# Altium PCB NAW_CW330_PANELIZED.PcbDoc
Units mm, origin at the board's own origin, x right, y up, seen from the top; angles counter-clockwise.
Board outline 200 x 165 mm, 8 copper layers (Top Layer, Int1 (GND), Int 2 (SIG), Int 3 (SIG), Int 4 (PWR), Int 5 (SIG), Int 6 (PWR), Bottom Layer), stack 1.527 mm thick; 8 components, 0 nets, 12 pads, 0 vias.
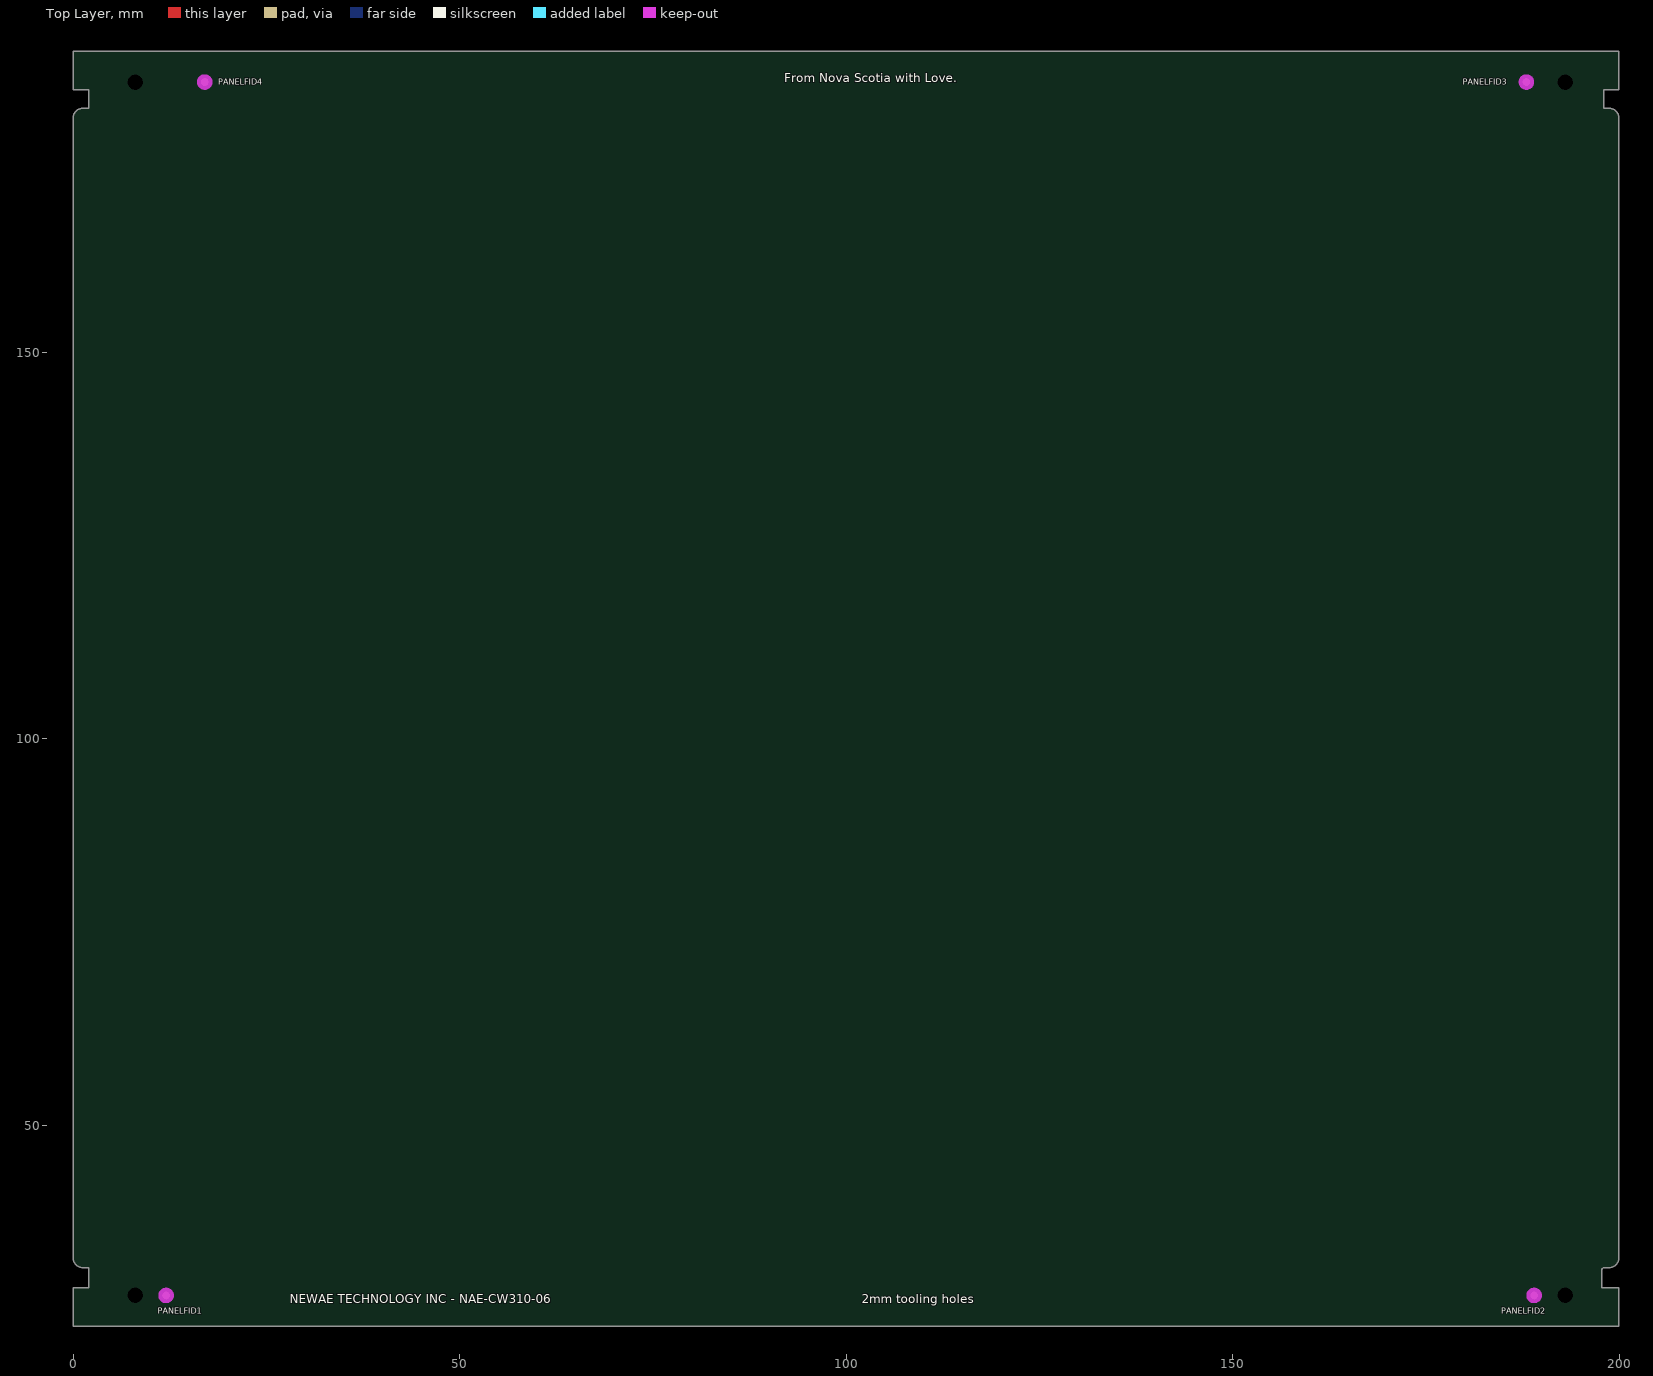
[diagram p0: Top Layer view]
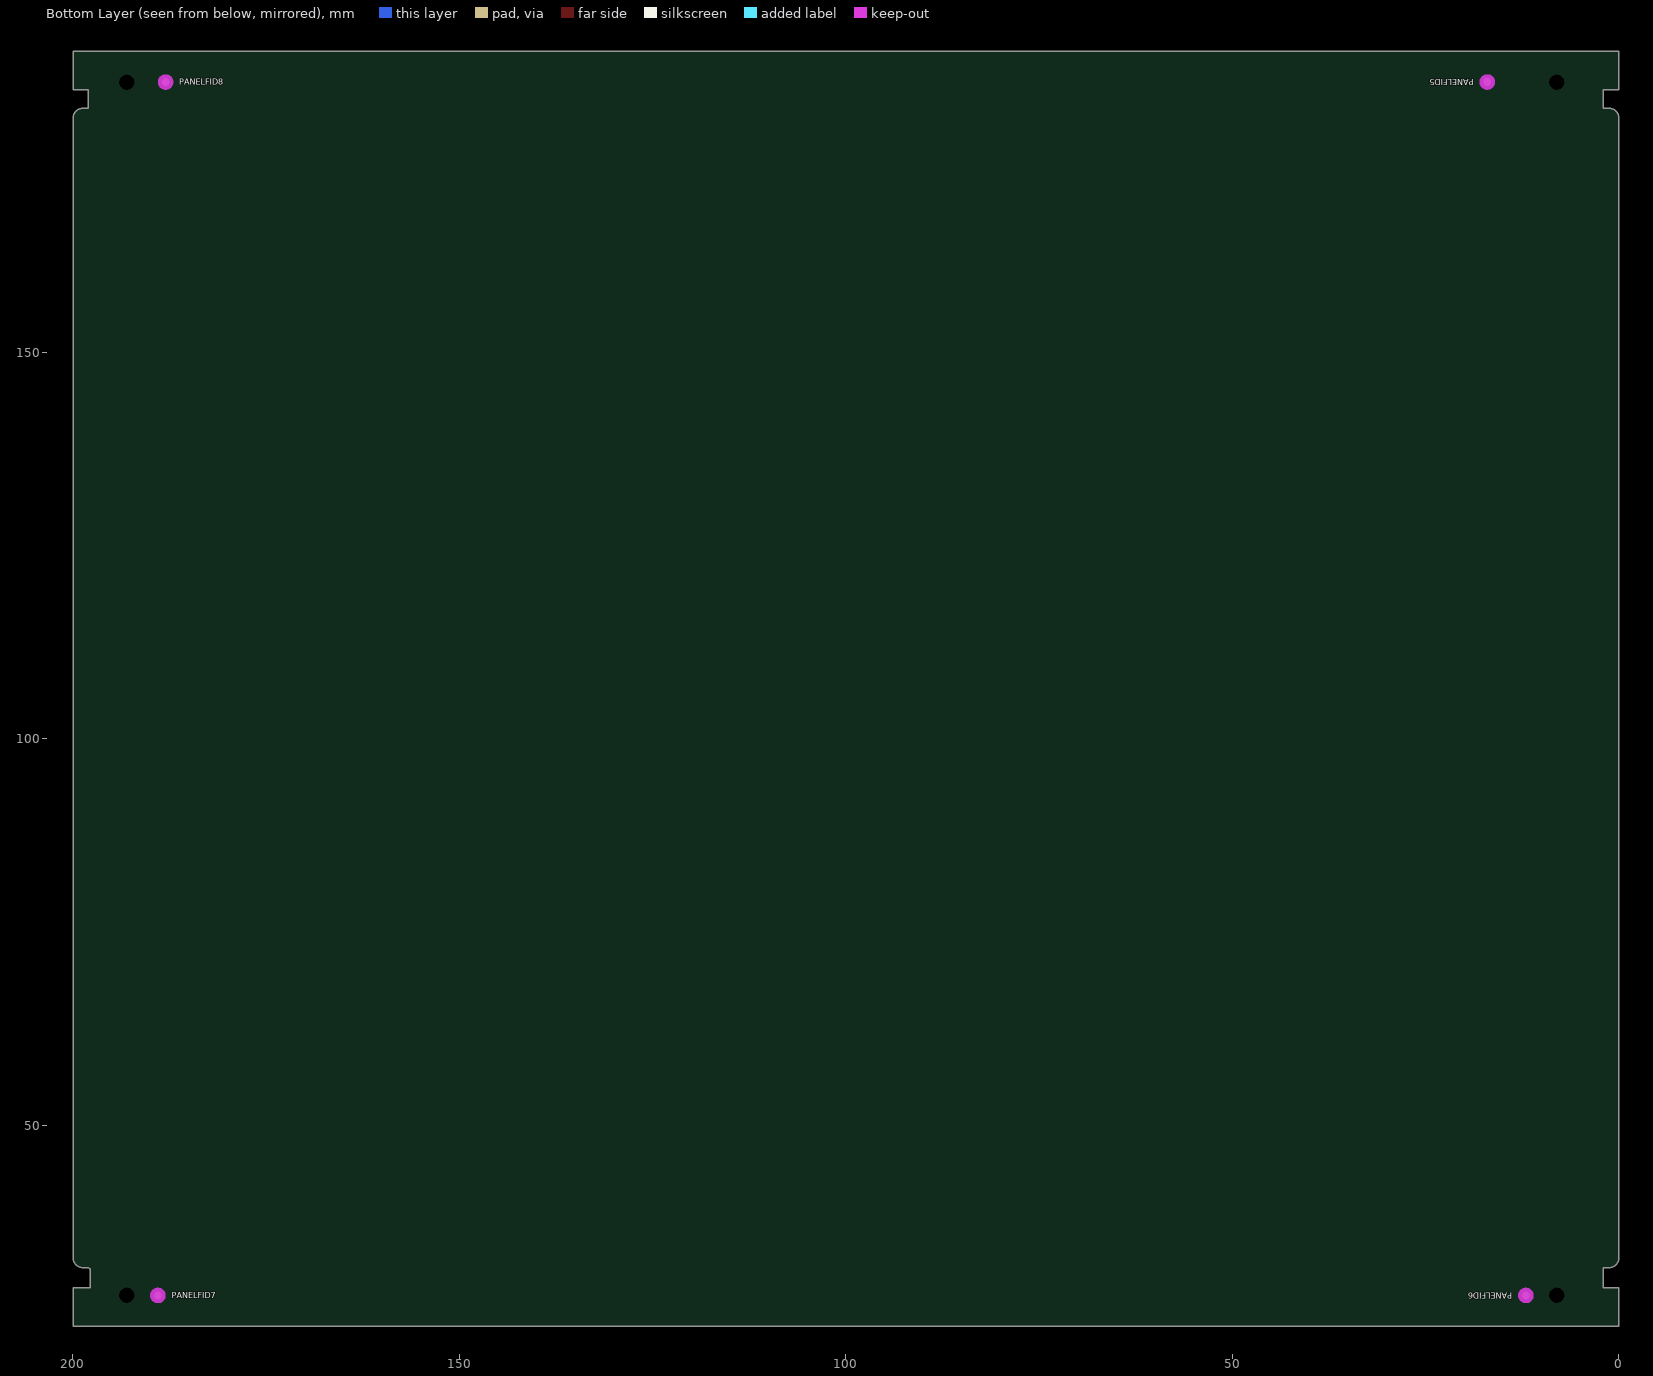
[diagram p1: Bottom Layer view, seen from below]
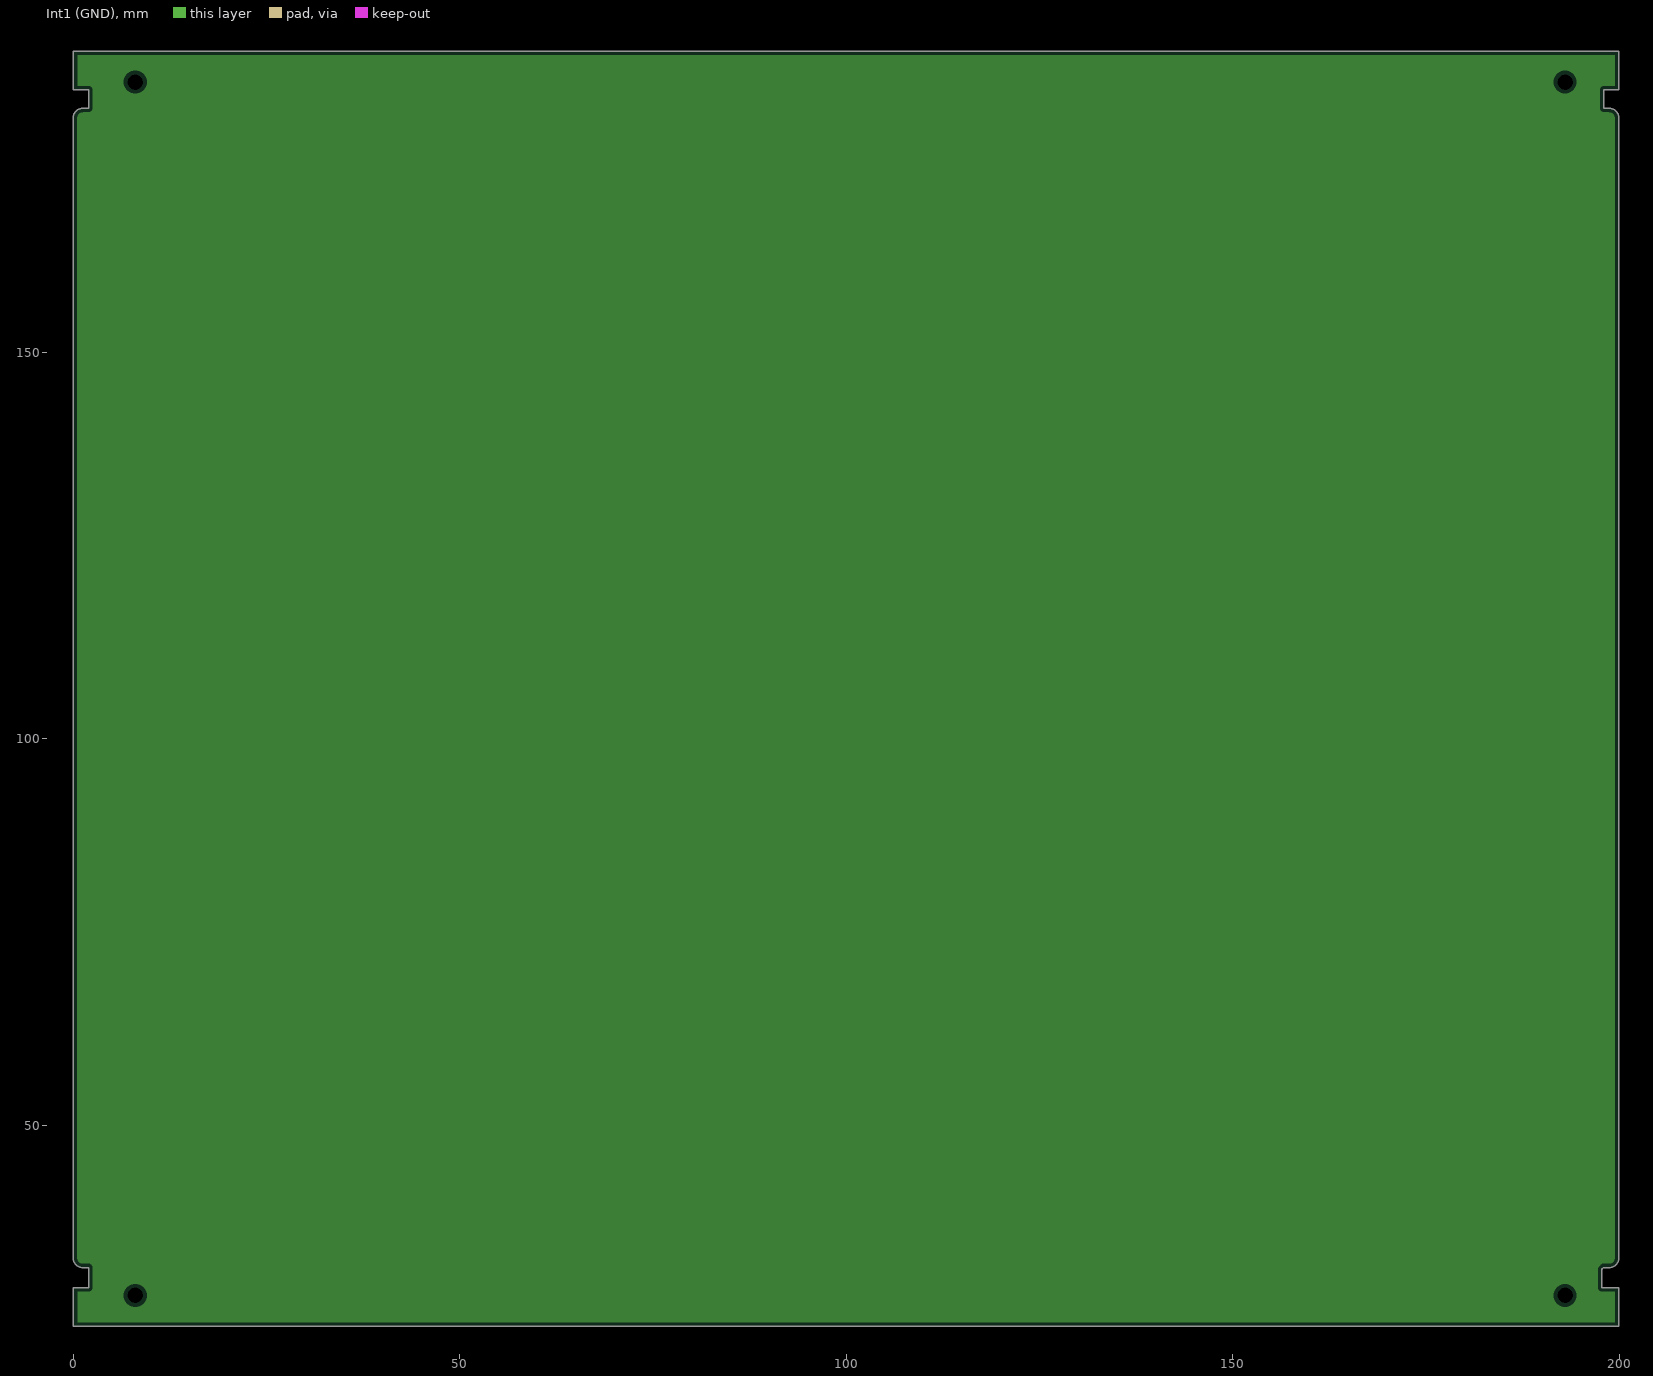
[diagram p2: Int1 (GND), clearances drawn from the general rule]
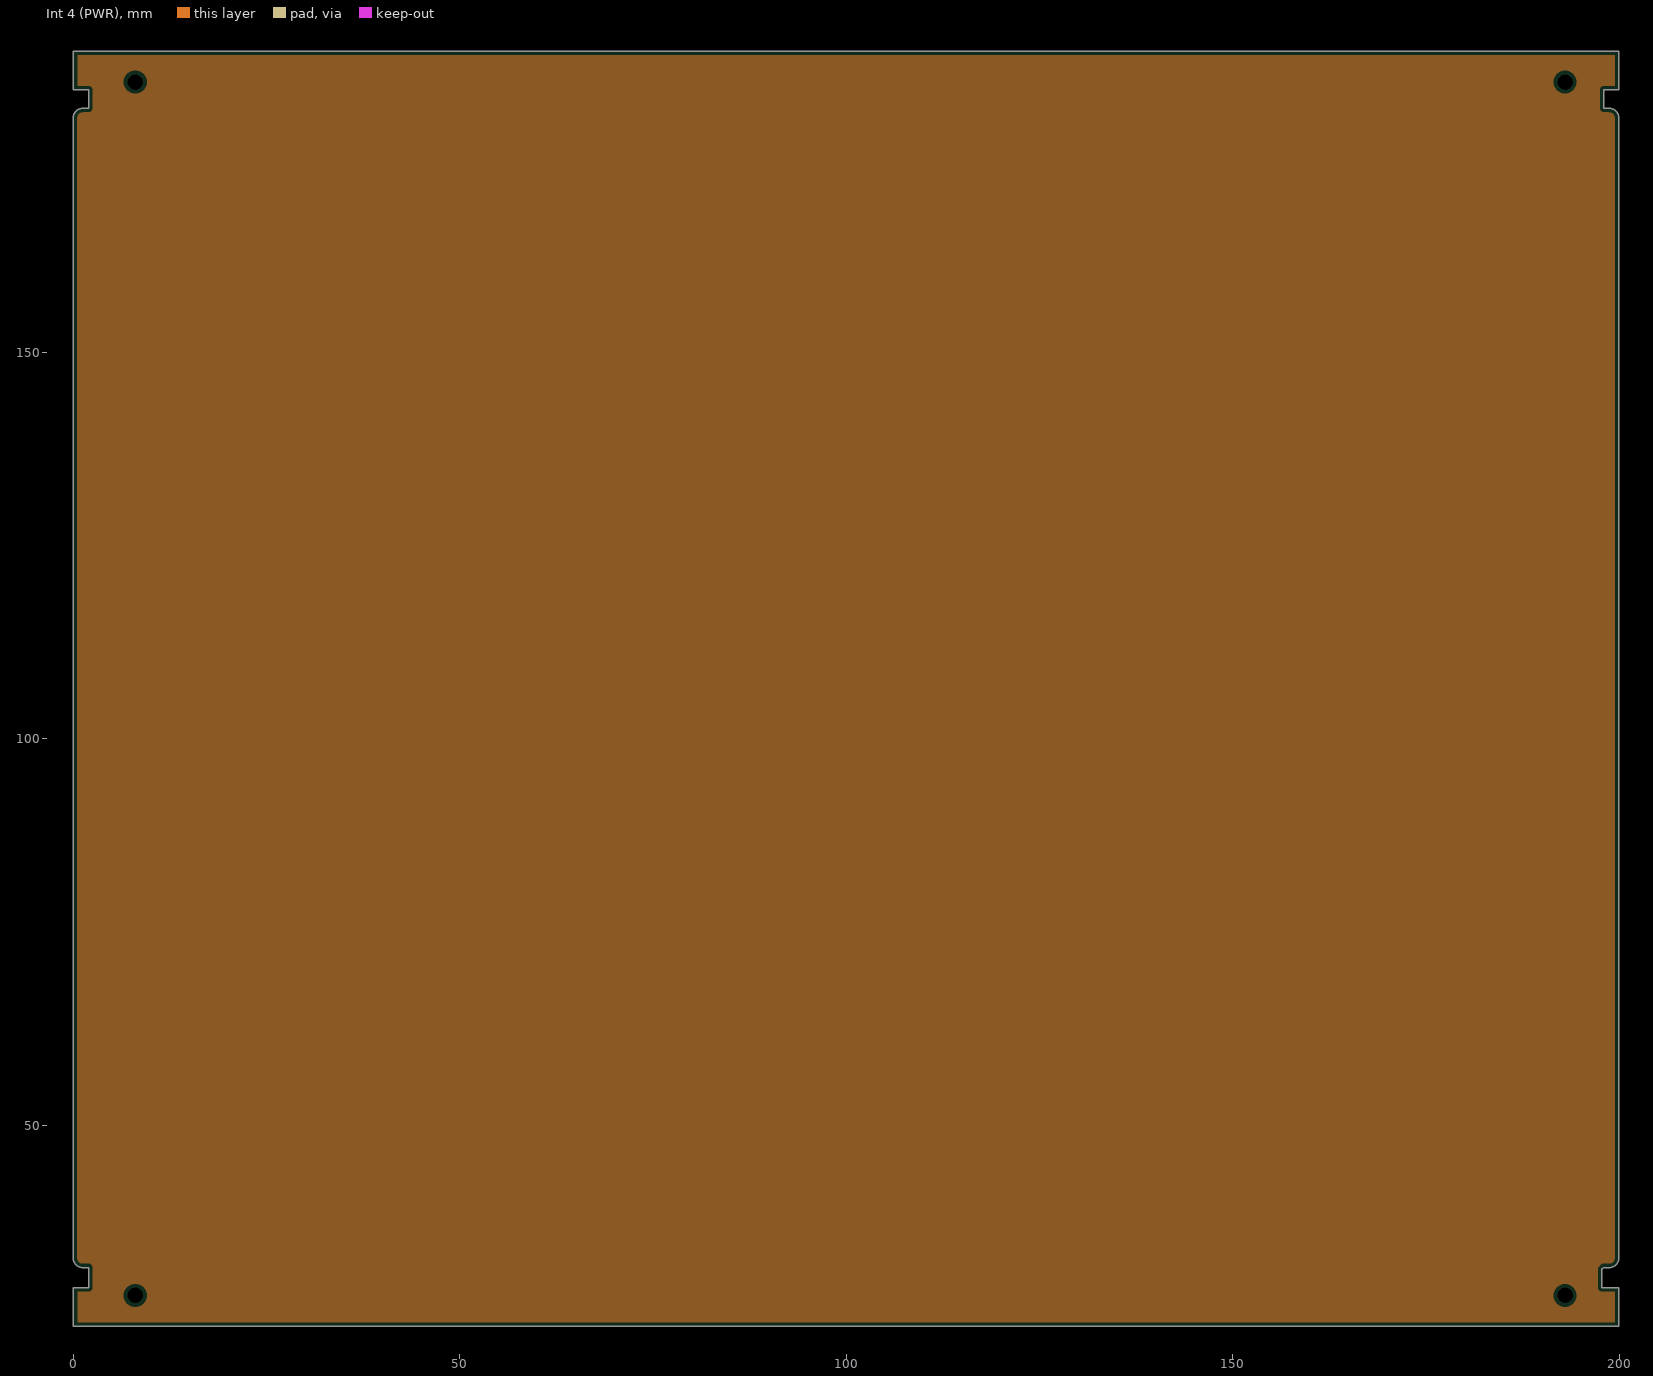
[diagram p3: Int 4 (PWR), clearances drawn from the general rule]
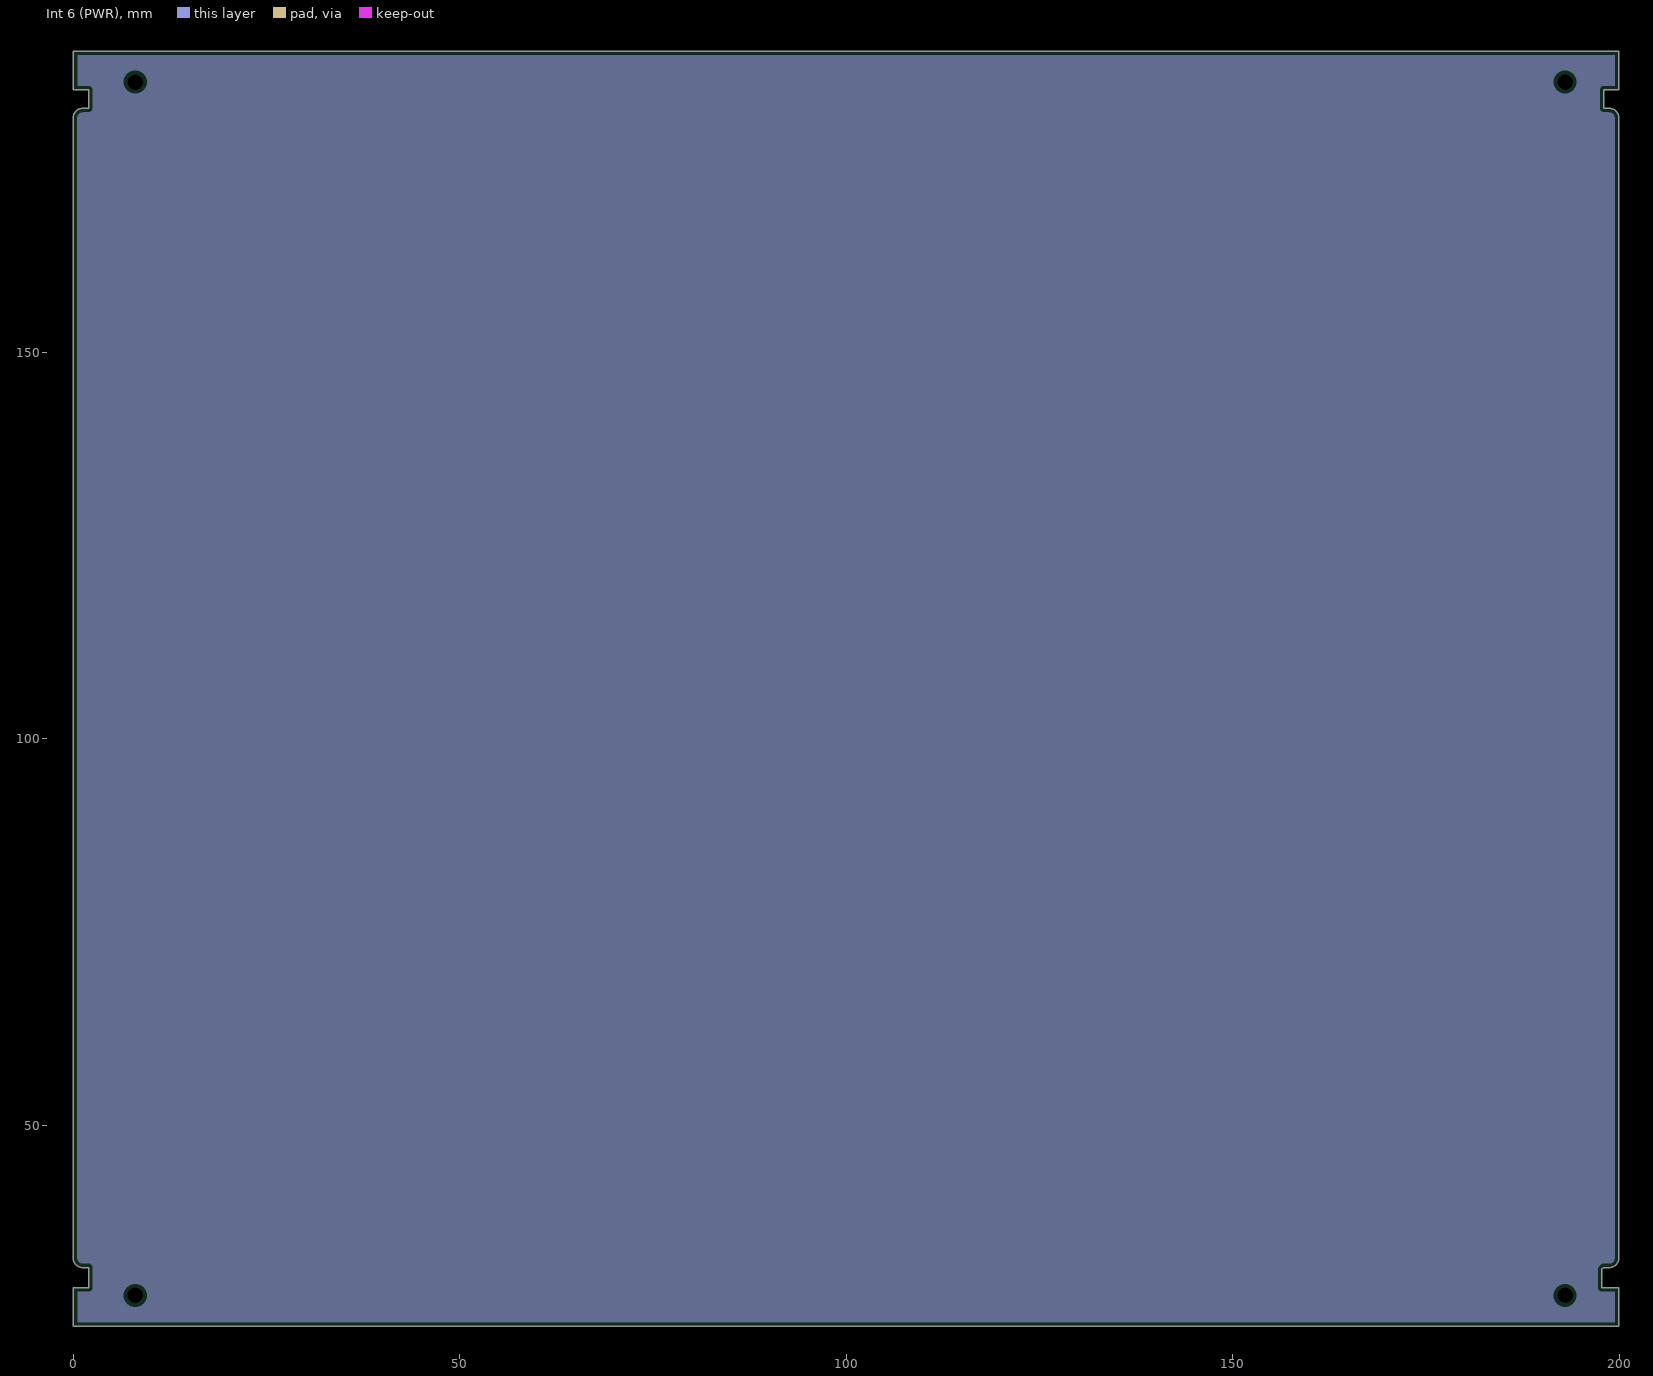
[diagram p4: Int 6 (PWR), clearances drawn from the general rule]

## Layer stack, top to bottom
Top Solder: solder mask 0.0254, SM-001, Dk 4
Top Layer: signal copper 0.035
Dielectric 1: prepreg 0.149, PP-006, Dk 4.2
Int1 (GND): plane copper 0.035
Dielectric 6: core 0.25, PP-006, Dk 4.2
Int 2 (SIG): signal copper 0.035
Dielectric 3: prepreg 0.147, PP-021, Dk 4.2
Int 3 (SIG): signal copper 0.035
Dielectric 7: core 0.13, Core-016, Dk 4.2
Int 4 (PWR): plane copper 0.035
Dielectric 8: prepreg 0.172, PP-021, Dk 4.2
Int 5 (SIG): signal copper 0.035
Dielectric 9: core 0.25, PP-006, Dk 4.2
Int 6 (PWR): plane copper 0.035
Dielectric 5: core 0.149, PP-006, Dk 4.2
Bottom Layer: signal copper 0.035
Bottom Solder: solder mask 0.0254, SM-001, Dk 4

## Board outline
0,24 0,29 1.968,29 1.968,31.6 1.238,31.6 cw(c1.238,32.87) -0.032,32.87 -0.032,33.6 -0.032,179.33 -0.032,180.33 cw(c1.238,180.33) 1.238,181.6 1.968,181.6 1.968,184 0,184 0,189 199.968,189 199.968,184 198,184 198,181.6 198.698,181.6 cw(c198.698,180.33) 199.968,180.33 199.968,32.87 cw(c198.698,32.87) 198.698,31.6 197.968,31.6 197.75,31.382 197.75,29 199.968,29 199.968,24

## Design rules (kind name [scope] priority, off if disabled: settings)
BoardOutlineClearance Silk_to_Outline [(OnLayer('Top Overlay'))] p1: gap=0 ignorepadtopadclearanceinfootprint=FALSE
BoardOutlineClearance [All] p2: gap=0.508 ignorepadtopadclearanceinfootprint=FALSE
Clearance Clearance_Power [InNet('+*') OR InNet('-*') OR InNet('GND')] p1: gap=0.254 ignorepadtopadclearanceinfootprint=FALSE
Clearance [All] p2: gap=0.152 ignorepadtopadclearanceinfootprint=FALSE except(0: Arc-Hole Track-Hole SMDPad-Hole THPad-Hole Via-Hole Fill-Hole Poly-Hole Region-Hole Text-Hole)
HoleSize [All] p1: absolutevalues=TRUE maxlimit=5.08 minlimit=0.025 maxpercent=80.000 minpercent=20.000
MinimumSolderMaskSliver [All] p1: minsoldermaskwidth=0.127
PlaneClearance [All] p1: clearance=0.508
PlaneConnect PlaneConnect_viaDirect [IsVia] p1: planeconnectstyle=Direct reliefexpansion=0.508 reliefentries=4 reliefconductorwidth=0.254 reliefairgap=0.254
PlaneConnect [All] p2: planeconnectstyle=Relief reliefexpansion=0.508 reliefentries=4 reliefconductorwidth=0.254 reliefairgap=0.254
PolygonConnect PolygonConnect_viaDirect [All vs isVia] p1: connectstyle=Direct reliefconductorwidth=0.254 reliefentries=4 polygonreliefangle="90 Angle" airgapwidth=0.254
PolygonConnect [All] p2: connectstyle=Relief reliefconductorwidth=0.254 reliefentries=4 polygonreliefangle="90 Angle" airgapwidth=0.254
RoutingVias [All] p1: holewidth=0.711 width=1.27 viastyle="Through Hole" minholewidth=0.711 minwidth=1.27 maxholewidth=0.711 maxwidth=1.27
SilkToSilkClearance [All] p1: silktosilkclearance=0.127
SilkToSolderMaskClearance [IsPad] p1: minsilkscreentomaskgap=0.127 clearancetoexposedcopper=TRUE
SolderMaskExpansion [All] p1: expansion=0.102 istentingtop=FALSE
Width [All] p1: maxlimit=2.54 minlimit=0.152 preferedwidth=0.254 toplayer_prefwidth=0.203 midlayer1_minwidth=0.254 midlayer1_maxwidth=0.254 midlayer2_minwidth=0.254 midlayer2_maxwidth=0.254 midlayer3_minwidth=0.254 midlayer3_maxwidth=0.254 bottomlayer_prefwidth=0.203 minimp=50.000000 maximp=50.000000 favimp=50.000000
24 further rules are at their usual default settings.

## Components (designator, comment, footprint, x,y, rotation, side; value= is the part's Value field where it differs from the comment)
PANELFID1 "Comment" FID1X2R 12,28 r0 top
PANELFID2 "Comment" FID1X2R 189,28 r0 top
PANELFID3 "Comment" FID1X2R 188,185 r0 top
PANELFID4 "Comment" FID1X2R 17,185 r180 top
PANELFID5 "Comment" FID1X2R 17,185 r180 bottom
PANELFID6 "Comment" FID1X2R 12,28 r180 bottom
PANELFID7 "Comment" FID1X2R 189,28 r0 bottom
PANELFID8 "Comment" FID1X2R 188,185 r0 bottom

## Footprints (in the part's own frame and the unit in brackets; to place one, negate y for a bottom-side part, rotate by r counter-clockwise, add the part's x,y. Pads: shape width x height; smd on the part's side, far side on the other; paste and mask are expansions set on the pad)
FID1X2R [mm] "Fiducial - Round 1x2mm"
  round 1 smd paste-0.5 mask+0.5: 0(0,0)
  Top Layer keep-out circle w1: c0,0 r0.5

## Part data
PANELFID1 PANELFID2 PANELFID3 PANELFID4 PANELFID5 PANELFID6 PANELFID7 PANELFID8: library part CCHIP-10p-0603

## Free pads (board coordinates)
  round 0 hole 2 unplated: MH1(8,28) MH2(8,185) MH3(193,185) MH4(193,28)

## Nets (pads, with @x,y where several pads share a name; then routed paths per layer and width w, separated by ;. In a path a pad name is that pad's centre, name@x,y a point inside that pad or via, vN(x,y) a via of type N, cw(c..) or ccw(c..) an arc to the next point about the centre after c; other vN are vias at no path point)
pads on no net: PANELFID1.0 PANELFID2.0 PANELFID3.0 PANELFID4.0 PANELFID5.0 PANELFID6.0 PANELFID7.0 PANELFID8.0

## Polygon pours and split planes (outlines as drawn)
no net on Int1 (GND) (split plane): 151 vertices, not listed, extent 0.477,24.51 199.459,188.49
no net on Int 4 (PWR) (split plane): 151 vertices, not listed, extent 0.477,24.51 199.459,188.49
no net on Int 6 (PWR) (split plane): 151 vertices, not listed, extent 0.477,24.51 199.459,188.49

## Silkscreen, mask and mechanical layers (free items; w line width, h text height)
Top Overlay:
  text "From Nova Scotia with Love." at 92,185 h1.14
  text "NEWAE TECHNOLOGY INC - NAE-CW310-06" at 28,27 h1.14
  text "2mm tooling holes" at 102,27 h1.14
Route Tool Path:
  lines w0.254: -0.032,32.87 ccw(c1.238,32.87) 1.238,31.6 1.968,31.6 1.968,29 0,29 0,24 199.968,24 199.968,29 197.75,29 197.75,31.382 197.968,31.6 198.698,31.6 ccw(c198.698,32.87) 199.968,32.87 199.968,33.6 199.968,179.6 199.968,180.33 ccw(c198.698,180.33) 198.698,181.6 198,181.6 198,184 199.968,184 199.968,189 0,189 0,184 1.968,184 1.968,181.6 1.238,181.6 ccw(c1.238,180.33) -0.032,180.33 -0.032,179.33 -0.032,33.6 -0.032,32.87
VScore:
  lines w0.254: 0,31.6 200,31.6 ; 0,181.6 200,181.6

## Panel: embedded boards
"NAE_CW310_KintexFPGA.PcbDoc" at 0,31.611, 1 rows x 1 columns, spacing 0 x 200, rotation 0